# EAGLE board ai_breakout_mics5524 (EAGLE 6.6.0)
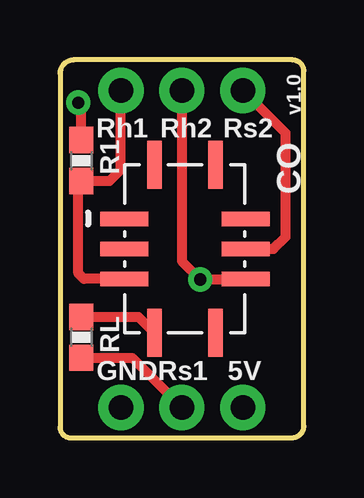
[diagram p0: board, top side]
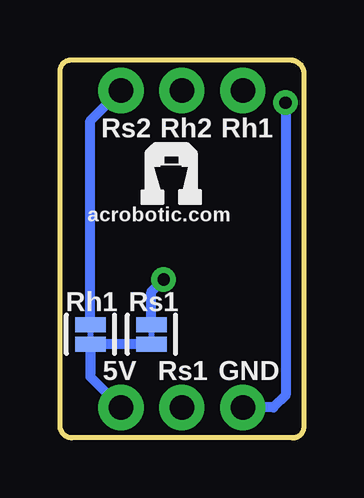
[diagram p1: board, bottom side, seen from below]

Size 10.16 x 15.75 mm. Coordinates in mm from the lower left corner, seen from the top.
Outline: 9.7,15.75 0.57,15.75 arc90 0,15.18 0,0.46 arc90 0.46,0 9.65,0 arc90 10.16,0.51 10.16,15.28 arc90 9.7,15.75
Copper layers (1*16): Top 0.035mm / dielectric 1.5mm / Bottom 0.035mm
Design rules "ai_2layer": minimum track width 7mil, minimum drill 15mil, track to track 8mil, track to pad 8mil, pad to pad 8mil, via to via 8mil, smd to smd 8mil, copper to edge 8mil, drill to drill 8mil, minimum pad ring 12mil, minimum via ring 10mil, stop-mask expansion 4mil, vias tented up to drill 20mil, thermal gap 10mil
Net classes: 0 signal: width 0.254 mm; 1 power: width 0.305 mm

## Footprints (pad centres in the part's own frame; a part is rotated, then mirrored left to right if it is on the bottom)
1X03-NOFIRST = drill 1.016 pad 1.88: 1 -2.54,0; 2 0,0; 3 2.54,0
1X02-SJ-NCT = smd 0.635 x 1.27: 1 -0.401,0; 2 0.413,0
RES-0603 = smd 1.1 x 1: 1 -0.85,0; 2 0.85,0
MICS-SMD10 = smd 0.6 x 2: A -1.25,-2.54; B 0,-2.54; C 1.25,-2.54; F 1.25,2.54; G 0,2.54; H -1.25,2.54 | smd 2 x 0.6: D 3.5,-1.27; E 3.5,1.27; J -3.5,1.27; K -3.5,-1.27

## Placement (x,y rotation side)
J1  1X03NOFIRST  [1X03-NOFIRST]  5.08,14.48 180 top
J2  1X03NOFIRST  [1X03-NOFIRST]  5.08,1.27 180 top
JS1  1X02-SJ-NCT  [1X02-SJ-NCT]  8.89,4.32 270 bottom
JS2  1X02-SJ-NCT  [1X02-SJ-NCT]  6.35,4.32 270 bottom
R1  82  [RES-0603]  0.89,11.56 270 top
RL  820  [RES-0603]  0.89,4.19 270 top
U2  MICS-5524  [MICS-SMD10]  5.21,7.87 270 top
U$3  AI-LOGOXS  [AI-LOGO-XS]  6.86,9.65 0 bottom

## Library data of the parts
J1 J2 JS1 JS2 = Ai_Connectors
R1 RL = Ai_Passives
U2 = Ai_IC
U$3 = Ai_Miscellany

## Nets
5V [power]: J2.1 JS1.2 JS2.2
A/RH1: J1.3 R1.2 U2.C
B/RS1: J2.2 RL.2
GND [power]: J2.3 R1.1
H/RH2: J1.2 JS2.1 U2.F
J/RS2: J1.1 JS1.1 U2.G
N$1: RL.1 U2.D

## Tracks (layer width: path | path; a pad name or v marks a point on that pad's centre or on a via)
5V
  Bottom 0.406: J2.1 8.89,2.54 JS1.2 JS2.2
A/RH1
  Top 0.406: U2.C 1,6.62 0.76,6.86 0.76,10.58 R1.2 2.07,10.71 2.54,11.18 J1.3
B/RS1
  Top 0.406: RL.2 3.01,3.34 J2.2
GND  (via drill 0.51)
  Top 0.406: R1.1 0.89,13.84 v0.76,13.97
  Bottom 0.406: v0.76,13.97 0.76,1.78 1.27,1.27 J2.3
H/RH2  (via drill 0.51)
  Top 0.406: U2.F 7.73,6.6 v5.84,6.6 5.08,7.37 J1.2
  Bottom 0.406: JS2.1 6.35,6.1 v5.84,6.6
J/RS2
  Top 0.406: U2.G 8.89,7.87 9.4,8.38 9.4,12.7 J1.1
  Bottom 0.406: JS1.1 8.89,13.21 J1.1
N$1
  Top 0.406: RL.1 3.27,5.04 U2.D

## Text on the board
tPlace: Rh1 | Rh2 | Rs2 | v1.0 | CO | GND | Rs1 | 5V
bPlace: Rh1 | Rh2 | Rs2 | acrobotic.com | Rs1 | Rh1 | GND | Rs1 | 5V